# Altium PCB PCB_Instruction Register 2.0V_2021-10-21.pcbdoc
Units mm, origin at the board's own origin, x right, y up, seen from the top; angles counter-clockwise.
Board outline 124.71 x 83.95 mm, 2 copper layers (Top Layer, Bottom Layer); 28 components, 33 nets, 114 pads, 43 vias.
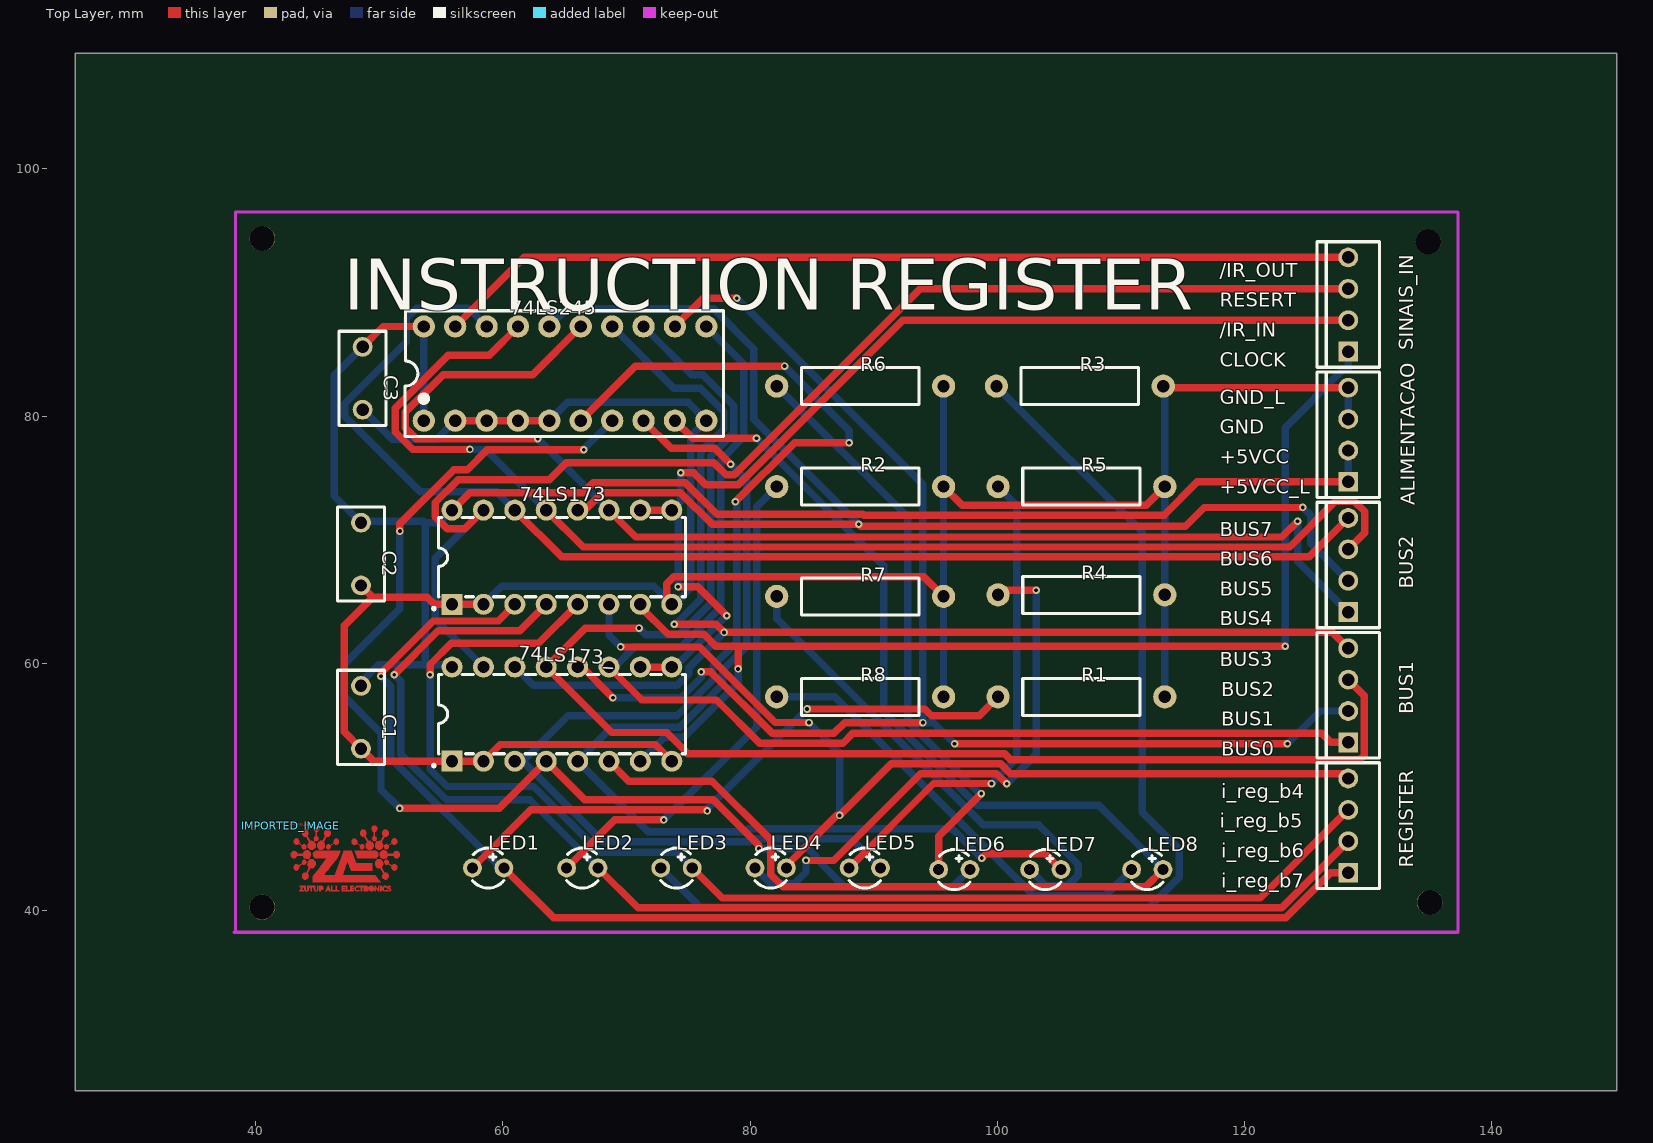
[diagram p0: Top Layer view]
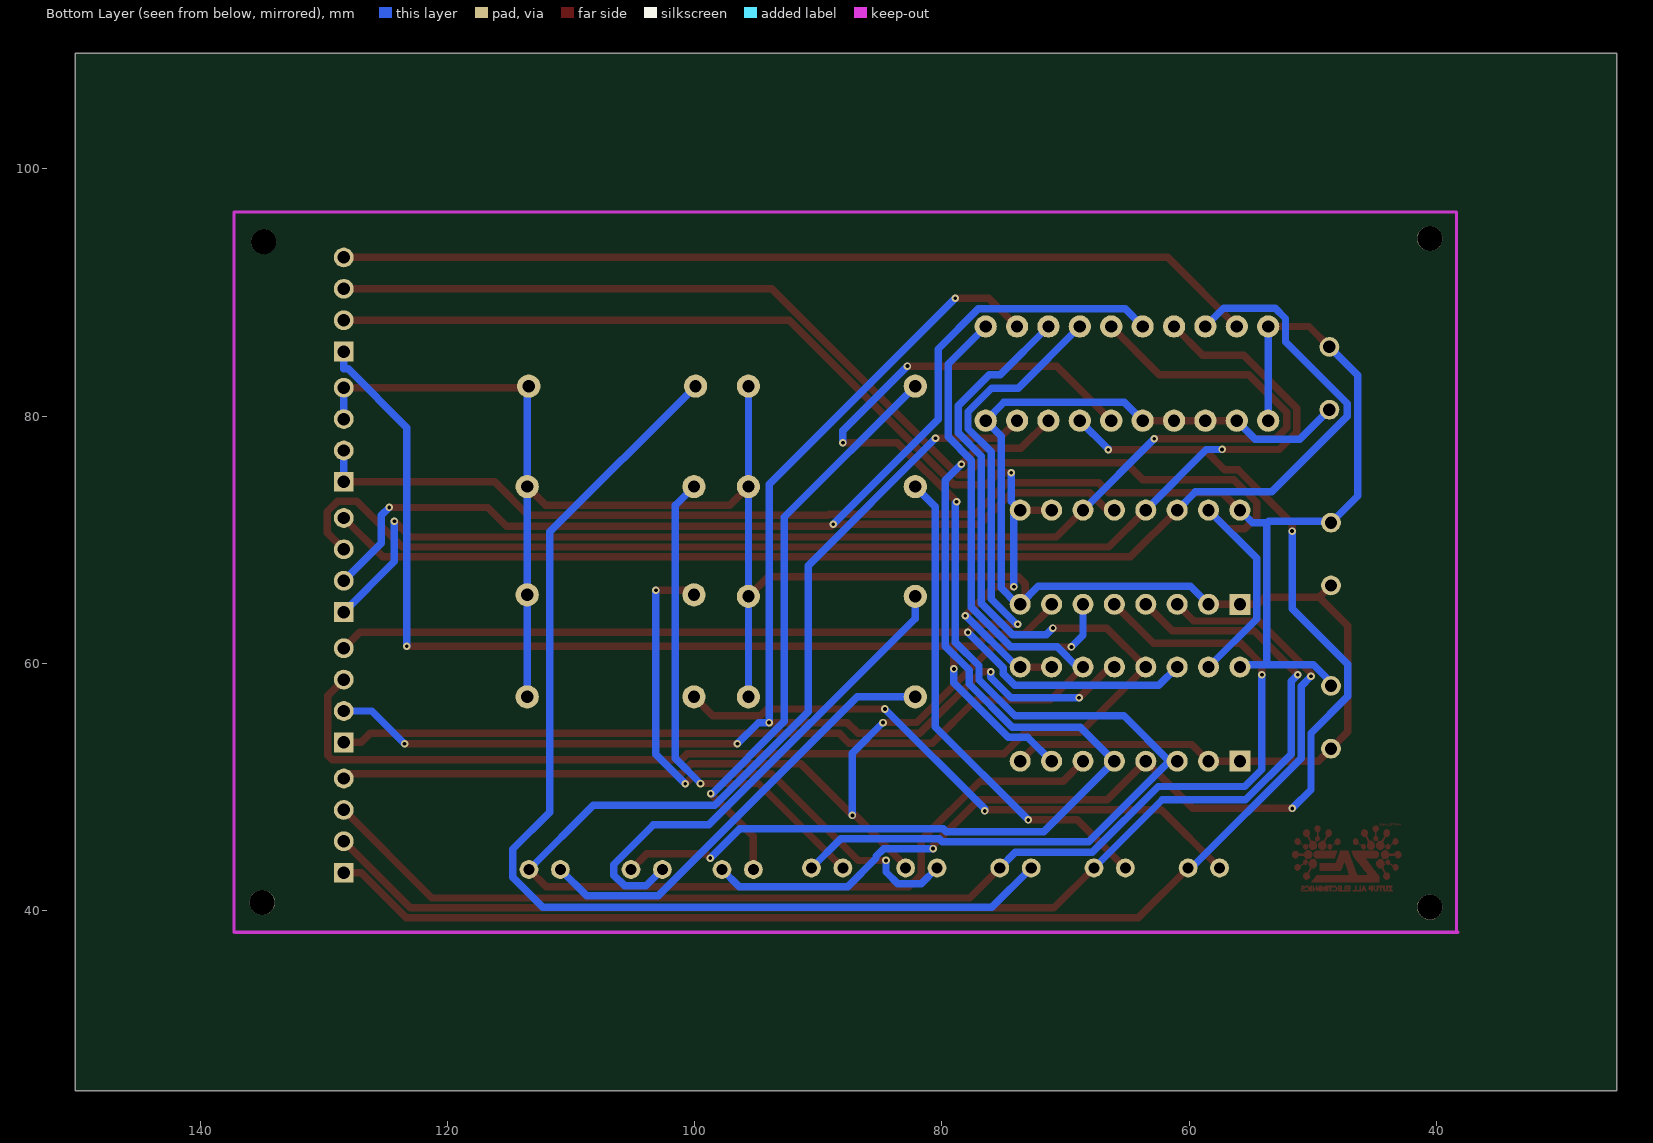
[diagram p1: Bottom Layer view, seen from below]

## Layer stack, top to bottom
Top Layer: signal copper (thickness not stored)
Dielectric: dielectric 0.32, FR-4, Dk 4.8
Bottom Layer: signal copper (thickness not stored)

## Board outline
150.114,25.4 25.4,25.4 25.4,109.347 150.114,109.347

## Components (designator, comment, footprint, x,y, rotation, side; value= is the part's Value field where it differs from the comment)
74LS173 "SN74LS173AN" PDIP-16_L19.7-W6.6-P2.54-LS7.6-BL 64.77,68.58 r0 top
74LS173_ "SN74LS173AN" PDIP-16_L19.7-W6.6-P2.54-LS7.6-BL 64.77,55.88 r0 top
74LS245 "SN74LS245N" DIP-20_L25.5-W10.0-P2.54-LS7.6-BL 65.024,83.439 r0 top
ALIMENTACAO "ALIM." HDR-TH_4P-P2.54-D1.0 128.397,78.486 r90 top
BUS1 "BUS1" HDR-TH_4P-P2.54-D1.0 128.397,57.404 r90 top
BUS2 "BUS2" HDR-TH_4P-P2.54-D1.0 128.397,67.945 r90 top
C1 "100nF 63V poli7" CAP-TH_L7.6-W3.8-P5.08-D0.51 48.514,55.626 r270 top
C2 "100nF 63V poli" CAP-TH_L7.6-W3.8-P5.08-D0.51 48.514,68.834 r270 top
C3 "100nF 63V poli" CAP-TH_L7.6-W3.8-P5.08-D0.51 48.641,83.058 r270 top
IMPORTED_IMAGE "IMPORTED_IMAGE" IMPORTED_IMAGE 42.842,46.861 r0 top
LED1 "VERDE" LED-TH_BD3.0-P2.54-RD-GREEN 58.801,43.434 r0 top
LED2 "VERDE" LED-TH_BD3.0-P2.54-RD-GREEN 66.421,43.434 r0 top
LED3 "VERDE" LED-TH_BD3.0-P2.54-RD-GREEN 74.041,43.434 r0 top
LED4 "VERDE" LED-TH_BD3.0-P2.54-RD-GREEN 81.661,43.434 r0 top
LED5 "VERDE" LED-TH_BD3.0-P2.54-RD-GREEN 89.281,43.434 r0 top
LED6 "VERDE" LED-TH_BD3.0-P2.54-RD-GREEN 96.52,43.307 r0 top
LED7 "VERDE" LED-TH_BD3.0-P2.54-RD-GREEN 103.886,43.307 r0 top
LED8 "VERDE" LED-TH_BD3.0-P2.54-RD-GREEN 112.141,43.307 r0 top
R1 "470" RES-TH_BD3.0-L9.5-P13.50-D0.6 106.807,57.277 r0 top
R2 "470" RES-TH_BD3.0-L9.5-P13.50-D0.6 88.9,74.295 r0 top
R3 "470" RES-TH_BD3.0-L9.5-P13.50-D0.6 106.68,82.423 r0 top
R4 "470" RES-TH_BD3.0-L9.5-P13.50-D0.6 106.807,65.532 r0 top
R5 "470" RES-TH_BD3.0-L9.5-P13.50-D0.6 106.807,74.295 r0 top
R6 "470" RES-TH_BD3.0-L9.5-P13.50-D0.6 88.9,82.423 r0 top
R7 "470" RES-TH_BD3.0-L9.5-P13.50-D0.6 88.9,65.405 r0 top
R8 "470" RES-TH_BD3.0-L9.5-P13.50-D0.6 88.9,57.277 r0 top
REGISTER "REGIST." HDR-TH_4P-P2.54-D1.0 128.397,46.863 r90 top
SINAIS_IN "SINAIS IN" HDR-TH_4P-P2.54-D1.0 128.397,89.027 r90 top

## Footprints (in the part's own frame and the unit in brackets; to place one, negate y for a bottom-side part, rotate by r counter-clockwise, add the part's x,y. Pads: shape width x height; smd on the part's side, far side on the other; paste and mask are expansions set on the pad)
CAP-TH_L7.6-W3.8-P5.08-D0.51 [mm]
  round 1.6 hole 1: 1(-2.54,0) 2(2.54,0)
  silkscreen extent -3.81,-1.91 3.81,1.91
DIP-20_L25.5-W10.0-P2.54-LS7.6-BL [mm]
  round 1.8 hole 1: 1(-11.43,-3.81) 2(-8.89,-3.81) 3(-6.35,-3.81) 4(-3.81,-3.81) 5(-1.27,-3.81) 6(1.27,-3.81) 7(3.81,-3.81) 8(6.35,-3.81) 9(8.89,-3.81) 10(11.43,-3.81) 11(11.43,3.81) 12(8.89,3.81) 13(6.35,3.81) 14(3.81,3.81) 15(1.27,3.81) 16(-1.27,3.81) 17(-3.81,3.81) 18(-6.35,3.81) 19(-8.89,3.81) 20(-11.43,3.81)
  silkscreen extent -12.95,-5.08 12.83,5.08
HDR-TH_4P-P2.54-D1.0 [mm]
  rect 1.6x1.6 hole 1: 1(-3.81,0)
  round 1.6 hole 1: 2(-1.27,0) 3(1.27,0) 4(3.81,0)
  silkscreen extent -5.08,-2.54 5.08,2.54
IMPORTED_IMAGE [mm]
  Top Layer region: 1.05,-5.287 1.063,-5.331 0.684,-5.331 0.684,-5.297 0.685,-5.293 0.686,-5.288 0.689,-5.282 0.692,-5.275 0.696,-5.267 0.7,-5.258 0.706,-5.249 0.712,-5.239 0.718,-5.228 0.726,-5.217 0.733,-5.206 0.741,-5.194 0.75,-5.182 0.759,-5.17 0.768,-5.158 0.778,-5.146 0.798,-5.12 0.815,-5.097 0.83,-5.077 0.842,-5.06 0.852,-5.045 0.859,-5.031 0.863,-5.02 0.865,-5.011 0.865,-5.004 0.862,-4.998 0.857,-4.993 0.849,-4.99 0.839,-4.987 0.826,-4.986 0.811,-4.985 0.793,-4.985 0.716,-4.985 0.716,-4.881 1.027,-4.881 1.027,-4.93 1.026,-4.936 1.025,-4.942 1.023,-4.949 1.02,-4.957 1.017,-4.966 1.013,-4.975 1.009,-4.985 1.004,-4.995 0.998,-5.005 0.992,-5.016 0.986,-5.027 0.979,-5.038 0.972,-5.049 0.964,-5.06 0.957,-5.071 0.949,-5.082 0.932,-5.105 0.917,-5.125 0.904,-5.143 0.894,-5.158 0.886,-5.171 0.881,-5.183 0.878,-5.193 0.877,-5.201 0.878,-5.208 0.882,-5.213 0.888,-5.218 0.897,-5.222 0.907,-5.225 0.921,-5.228 0.936,-5.231 0.954,-5.233 1.037,-5.244
  Top Layer region: 2.302,-5.331 2.302,-4.881 2.393,-4.881 2.415,-4.881 2.436,-4.882 2.456,-4.884 2.474,-4.887 2.491,-4.89 2.507,-4.894 2.522,-4.899 2.536,-4.906 2.549,-4.912 2.561,-4.92 2.572,-4.929 2.582,-4.939 2.591,-4.95 2.6,-4.962 2.608,-4.975 2.615,-4.989 2.647,-5.054 2.583,-5.187 2.489,-5.209 2.395,-5.232 2.395,-5.331 hole: 452331.158,418003.357 452331.158,417285.553 452331.158,417285.553 453412.944,417517.455 453412.944,417517.455 453621.224,418720.907 453621.224,418720.907 452331.158,418720.907 452331.158,418720.907 452331.158,418003.357
  Top Layer region: 1.68,-5.158 1.68,-5.331 1.587,-5.331 1.587,-4.985 1.47,-4.985 1.452,-5.109 1.448,-5.135 1.442,-5.161 1.436,-5.186 1.429,-5.211 1.421,-5.233 1.413,-5.253 1.405,-5.27 1.398,-5.282 1.361,-5.331 1.153,-5.331 1.089,-5.197 1.089,-4.881 1.182,-4.881 1.182,-5.184 1.273,-5.267 1.305,-5.245 1.338,-5.223 1.338,-4.881 1.804,-4.881 1.804,-4.985 1.68,-4.985
  Top Layer region: 6.671,-5.276 6.622,-5.331 6.413,-5.331 6.315,-5.222 6.315,-5.007 6.418,-4.881 6.617,-4.881 6.665,-4.941 6.679,-4.96 6.692,-4.981 6.702,-5.002 6.711,-5.023 6.717,-5.046 6.722,-5.068 6.725,-5.091 6.727,-5.114 6.726,-5.137 6.724,-5.159 6.72,-5.181 6.713,-5.202 6.706,-5.222 6.696,-5.242 6.684,-5.26 hole: 493482.46,415978.723 494678.038,416690.685 494678.038,416690.685 494581.772,417619.309 494581.772,417619.309 494485.252,418547.933 494485.252,418547.933 493640.448,418656.391 493640.448,418656.391 492795.898,418764.595 492795.898,418764.595 492371.21,416882.455 492371.21,416882.455 493482.46,415978.723
  Top Layer region: 4.418,-5.279 4.418,-5.331 4.107,-5.331 4.107,-4.881 4.418,-4.881 4.418,-4.985 4.2,-4.985 4.2,-5.054 4.387,-5.054 4.387,-5.158 4.2,-5.158 4.2,-5.227 4.418,-5.227
  Top Layer region: 7.155,-5.106 7.155,-5.331 7.066,-5.331 6.875,-5.073 6.875,-5.331 6.782,-5.331 6.782,-4.881 6.86,-4.881 6.96,-5.011 7.06,-5.14 7.061,-5.011 7.062,-4.881 7.155,-4.881
  Top Layer region: 3.23,-5.304 3.241,-5.331 3.111,-5.331 3.111,-5.227 2.931,-5.227 2.895,-5.331 2.793,-5.331 2.814,-5.275 2.853,-5.171 2.895,-5.062 2.964,-4.881 3.068,-4.881 3.16,-5.119 hole: 458241.992,417509.581 458241.992,416990.151 458241.992,416990.151 458864.292,416990.151 458864.292,416990.151 458864.292,418028.757 458864.292,418028.757 458241.992,418028.757 458241.992,418028.757 458241.992,417509.581
  Top Layer region: 5.369,-5.33 5.278,-5.331 5.221,-5.273 5.164,-5.216 5.164,-4.988 5.233,-4.935 5.303,-4.881 5.463,-4.881 5.538,-4.964 5.538,-4.881 5.88,-4.881 5.88,-4.985 5.755,-4.985 5.755,-5.331 5.662,-5.331 5.662,-4.991 5.293,-4.991 5.275,-5.045 5.256,-5.098 5.291,-5.22 5.39,-5.263 5.426,-5.229 5.462,-5.196 5.508,-5.229 5.553,-5.261 5.506,-5.296 5.495,-5.302 5.481,-5.309 5.465,-5.315 5.447,-5.32 5.428,-5.324 5.408,-5.327 5.388,-5.329
  Top Layer region: 7.342,-5.106 7.342,-5.331 7.218,-5.331 7.218,-4.881 7.342,-4.881
  Top Layer region: 1.932,-5.331 1.884,-5.254 1.835,-5.177 1.835,-4.881 1.96,-4.881 1.96,-5.223 2.025,-5.267 2.115,-5.184 2.115,-4.881 2.209,-4.881 2.209,-5.197 2.144,-5.331
  Top Layer region: 4.48,-5.331 4.48,-4.881 4.573,-4.881 4.573,-5.227 4.76,-5.227 4.76,-5.331
  Top Layer region: 3.912,-5.287 3.925,-5.331 3.609,-5.331 3.609,-4.881 3.702,-4.881 3.702,-5.222 3.9,-5.244
  Top Layer region: 6.035,-5.279 6.035,-5.331 5.911,-5.331 5.911,-4.881 6.133,-4.881 6.253,-4.952 6.253,-5.154 6.185,-5.2 6.219,-5.238 6.232,-5.254 6.243,-5.272 6.25,-5.289 6.253,-5.303 6.249,-5.318 6.239,-5.327 6.225,-5.33 6.206,-5.329 6.186,-5.323 6.165,-5.312 6.146,-5.297 6.129,-5.279 6.111,-5.259 6.093,-5.242 6.076,-5.231 6.063,-5.227 6.035,-5.227 hole: 488729.866,417285.553 489274.188,417402.393 489274.188,417402.393 489818.764,417518.979 489818.764,417518.979 489818.764,418538.535 489818.764,418538.535 488729.866,418771.707 488729.866,418771.707 488729.866,417285.553
  Top Layer region: 3.267,-5.331 3.267,-4.881 3.36,-4.881 3.36,-5.227 3.578,-5.227 3.578,-5.331
  Top Layer region: 5.102,-5.279 5.102,-5.331 4.791,-5.331 4.791,-4.881 5.102,-4.881 5.102,-4.985 4.915,-4.985 4.915,-5.054 5.107,-5.054 5.094,-5.097 5.082,-5.14 4.999,-5.151 4.915,-5.162 4.915,-5.227 5.102,-5.227
  Top Layer region: 8.054,-5.325 7.495,-5.323 7.404,-5.222 7.404,-5.007 7.456,-4.944 7.507,-4.881 7.708,-4.881 7.777,-4.974 7.739,-5.016 7.553,-4.974 7.526,-5.023 7.52,-5.034 7.515,-5.046 7.511,-5.06 7.506,-5.074 7.503,-5.089 7.5,-5.104 7.499,-5.118 7.498,-5.13 7.497,-5.19 7.562,-5.228 7.626,-5.266 7.705,-5.193 7.727,-5.217 7.734,-5.222 7.745,-5.227 7.76,-5.231 7.778,-5.236 7.799,-5.24 7.822,-5.243 7.847,-5.246 7.872,-5.248 7.995,-5.255 8.027,-5.198 7.921,-5.159 7.814,-5.12 7.797,-5.069 7.779,-5.019 7.815,-4.915 7.887,-4.895 7.903,-4.891 7.92,-4.888 7.937,-4.885 7.954,-4.884 7.971,-4.883 7.987,-4.883 8.001,-4.884 8.014,-4.886 8.068,-4.898 8.081,-4.941 8.094,-4.985 7.902,-4.985 7.902,-5.012 7.904,-5.018 7.909,-5.025 7.918,-5.033 7.929,-5.042 7.943,-5.051 7.959,-5.06 7.976,-5.069 7.995,-5.078 8.088,-5.117 8.108,-5.172 8.127,-5.228
  Top Layer region: 7.249,-4.575 7.249,-4.604 1.773,-4.604 1.774,-4.353 1.775,-4.102 2.318,-3.392 2.427,-3.249 2.528,-3.115 2.621,-2.992 2.701,-2.883 2.768,-2.793 2.818,-2.723 2.85,-2.676 2.861,-2.657 2.862,-2.631 1.94,-2.631 1.876,-2.553 1.862,-2.536 1.849,-2.517 1.836,-2.496 1.824,-2.475 1.813,-2.455 1.804,-2.435 1.796,-2.416 1.791,-2.399 1.77,-2.323 1.82,-2.215 1.87,-2.108 1.938,-2.077 2.007,-2.047 3.01,-2.044 3.211,-2.044 3.399,-2.045 3.57,-2.046 3.718,-2.048 3.841,-2.051 3.934,-2.054 3.993,-2.057 4.013,-2.06 4.012,-2.066 4.008,-2.078 4.001,-2.095 3.992,-2.116 3.981,-2.142 3.968,-2.172 3.954,-2.205 3.938,-2.241 3.921,-2.279 3.903,-2.319 3.89,-2.346 3.768,-2.613 3.222,-3.298 3.112,-3.436 3.01,-3.566 2.917,-3.684 2.836,-3.787 2.769,-3.873 2.719,-3.939 2.687,-3.982 2.675,-3.999 2.678,-4.001 2.684,-4.003 2.695,-4.004 2.709,-4.006 2.727,-4.007 2.749,-4.008 2.774,-4.01 2.801,-4.011 2.832,-4.012 2.865,-4.013 2.9,-4.013 2.938,-4.014 2.977,-4.015 3.018,-4.015 3.06,-4.015 3.104,-4.015 3.533,-4.015 3.905,-3.029 4.278,-2.043 4.59,-2.043 4.902,-2.042 5.088,-2.536 5.274,-3.029 6.595,-3.047 6.595,-3.635 4.863,-3.635 4.729,-3.288 4.701,-3.219 4.675,-3.154 4.65,-3.095 4.627,-3.044 4.607,-3.002 4.591,-2.97 4.579,-2.949 4.572,-2.942 4.565,-2.954 4.551,-2.986 4.531,-3.035 4.506,-3.1 4.477,-3.177 4.446,-3.263 4.413,-3.355 4.379,-3.451 4.345,-3.547 4.313,-3.642 4.282,-3.731 4.255,-3.812 4.233,-3.882 4.215,-3.938 4.204,-3.978 4.2,-3.999 4.207,-4.001 4.227,-4.002 4.259,-4.004 4.304,-4.005 4.359,-4.007 4.425,-4.008 4.501,-4.009 4.586,-4.011 4.68,-4.012 4.781,-4.013 4.89,-4.013 5.005,-4.014 5.125,-4.015 5.251,-4.015 5.382,-4.015 5.516,-4.015 6.831,-4.015 7.04,-4.281 7.082,-4.335 7.121,-4.386 7.156,-4.434 7.187,-4.477 7.213,-4.514 7.232,-4.543 7.244,-4.564
  Top Layer region: 1.27,-4.348 1.179,-4.4 1.111,-4.377 1.095,-4.37 1.079,-4.362 1.06,-4.351 1.042,-4.339 1.023,-4.326 1.005,-4.312 0.988,-4.297 0.972,-4.282 0.902,-4.211 0.902,-3.99 0.967,-3.899 1.031,-3.808 1.241,-3.808 1.348,-3.596 1.455,-3.384 1.331,-3.149 1.351,-3.032 1.37,-2.915 1.452,-2.825 1.533,-2.735 1.809,-2.735 1.9,-2.836 1.991,-2.937 1.991,-3.218 1.813,-3.44 1.551,-3.447 1.45,-3.657 1.349,-3.866 1.395,-3.973 1.44,-4.08 1.36,-4.295
  Top Layer region: 7.7,-4.376 7.621,-4.398 7.533,-4.347 7.444,-4.295 7.404,-4.188 7.364,-4.08 7.41,-3.972 7.456,-3.864 7.245,-3.443 6.993,-3.443 6.813,-3.218 6.813,-2.937 6.904,-2.836 6.995,-2.735 7.271,-2.735 7.431,-2.913 7.452,-3.015 7.472,-3.118 7.412,-3.253 7.351,-3.389 7.457,-3.598 7.563,-3.808 7.773,-3.808 7.837,-3.899 7.902,-3.99 7.902,-4.179 7.84,-4.266 7.778,-4.354
  Top Layer region: 0.449,-3.634 0.437,-3.635 0.382,-3.635 0.3,-3.563 0.218,-3.491 0.218,-3.276 0.353,-3.115 0.515,-3.115 0.579,-3.165 0.642,-3.215 0.772,-3.128 0.902,-3.042 0.902,-2.878 0.953,-2.822 1.003,-2.765 1.1,-2.776 1.197,-2.787 1.28,-2.981 1.184,-3.145 1.06,-3.188 0.994,-3.149 0.927,-3.109 0.654,-3.271 0.688,-3.389 0.593,-3.592 0.543,-3.613 0.532,-3.617 0.519,-3.621 0.505,-3.625 0.491,-3.628 0.477,-3.631 0.463,-3.633
  Top Layer region: 8.504,-3.563 8.422,-3.635 8.367,-3.635 8.341,-3.633 8.313,-3.628 8.285,-3.621 8.261,-3.613 8.211,-3.592 8.116,-3.389 8.133,-3.33 8.15,-3.271 8.014,-3.19 7.877,-3.109 7.81,-3.149 7.744,-3.188 7.682,-3.167 7.62,-3.145 7.574,-3.066 7.527,-2.987 7.548,-2.921 7.553,-2.907 7.559,-2.892 7.565,-2.877 7.572,-2.862 7.579,-2.848 7.586,-2.834 7.593,-2.822 7.599,-2.812 7.63,-2.769 7.804,-2.769 7.853,-2.824 7.902,-2.878 7.902,-3.042 8.032,-3.128 8.162,-3.215 8.289,-3.115 8.442,-3.115 8.586,-3.266 8.586,-3.491
  Top Layer region: 1.178,-2.7 1.058,-2.629 1.011,-2.526 0.963,-2.423 0.525,-2.423 0.368,-2.631 0.153,-2.631 0.076,-2.546 0,-2.461 0,-2.222 0.198,-2.036 0.291,-2.057 0.385,-2.078 0.441,-2.135 0.463,-2.16 0.481,-2.188 0.493,-2.215 0.498,-2.238 0.498,-2.285 0.963,-2.285 1.012,-2.178 1.062,-2.072 1.161,-2.024 1.183,-2.013 1.202,-2.004 1.22,-1.996 1.235,-1.99 1.249,-1.985 1.262,-1.981 1.275,-1.979 1.287,-1.978 1.299,-1.979 1.311,-1.981 1.324,-1.984 1.338,-1.989 1.354,-1.995 1.371,-2.002 1.39,-2.011 1.412,-2.021 1.516,-2.07 1.618,-2.231 1.618,-2.426 1.571,-2.528 1.524,-2.629 1.464,-2.664 1.404,-2.7
  Top Layer region: 7.377,-2.7 7.214,-2.544 7.196,-2.398 7.178,-2.251 7.231,-2.161 7.284,-2.071 7.383,-2.024 7.405,-2.013 7.425,-2.004 7.442,-1.996 7.457,-1.99 7.472,-1.985 7.485,-1.981 7.497,-1.979 7.509,-1.978 7.521,-1.979 7.533,-1.981 7.547,-1.984 7.561,-1.989 7.577,-1.995 7.594,-2.003 7.614,-2.012 7.636,-2.022 7.742,-2.071 7.792,-2.178 7.841,-2.285 8.306,-2.285 8.306,-2.238 8.307,-2.228 8.311,-2.215 8.316,-2.202 8.323,-2.188 8.331,-2.174 8.341,-2.16 8.351,-2.147 8.363,-2.135 8.419,-2.078 8.513,-2.057 8.606,-2.036 8.705,-2.129 8.804,-2.222 8.804,-2.461 8.728,-2.546 8.651,-2.631 8.443,-2.631 8.374,-2.56 8.348,-2.53 8.326,-2.501 8.312,-2.475 8.306,-2.456 8.306,-2.423 7.841,-2.423 7.746,-2.629 7.626,-2.7
  Top Layer region: 5.384,-2.631 5.274,-2.366 5.252,-2.313 5.231,-2.261 5.213,-2.214 5.196,-2.171 5.183,-2.134 5.173,-2.104 5.166,-2.083 5.164,-2.072 5.164,-2.042 6.847,-2.042 6.935,-2.093 7.023,-2.144 7.043,-2.2 7.047,-2.213 7.05,-2.23 7.053,-2.249 7.056,-2.271 7.059,-2.294 7.06,-2.317 7.062,-2.34 7.062,-2.363 7.062,-2.471 6.994,-2.551 6.927,-2.631
  Top Layer region: 1.551,-1.973 1.461,-1.874 1.372,-1.774 1.35,-1.676 1.328,-1.578 1.391,-1.45 1.454,-1.321 1.231,-0.9 1.055,-0.9 0.979,-0.815 0.902,-0.73 0.902,-0.622 0.903,-0.599 0.905,-0.575 0.908,-0.55 0.912,-0.526 0.917,-0.503 0.922,-0.481 0.929,-0.462 0.935,-0.446 0.968,-0.377 1.036,-0.346 1.052,-0.34 1.068,-0.334 1.087,-0.329 1.105,-0.324 1.124,-0.32 1.143,-0.317 1.16,-0.315 1.176,-0.314 1.247,-0.312 1.324,-0.396 1.4,-0.481 1.4,-0.748 1.329,-0.827 1.436,-1.028 1.543,-1.229 1.619,-1.239 1.636,-1.241 1.654,-1.244 1.674,-1.247 1.694,-1.251 1.714,-1.254 1.734,-1.258 1.752,-1.262 1.768,-1.266 1.841,-1.284 1.916,-1.374 1.991,-1.464 1.99,-1.606 1.99,-1.748 1.936,-1.822 1.924,-1.838 1.91,-1.854 1.894,-1.87 1.878,-1.885 1.861,-1.9 1.845,-1.914 1.829,-1.925 1.814,-1.934 1.746,-1.973
  Top Layer region: 2.652,-1.872 2.55,-1.973 2.459,-1.973 2.439,-1.972 2.417,-1.97 2.394,-1.966 2.37,-1.961 2.347,-1.955 2.325,-1.948 2.304,-1.94 2.286,-1.932 2.204,-1.89 2.16,-1.795 2.15,-1.773 2.142,-1.751 2.135,-1.729 2.129,-1.707 2.124,-1.684 2.121,-1.662 2.118,-1.639 2.117,-1.617 2.118,-1.594 2.119,-1.572 2.122,-1.549 2.125,-1.526 2.13,-1.504 2.137,-1.481 2.144,-1.458 2.153,-1.436 2.19,-1.345 2.361,-1.246 2.567,-1.245 2.671,-1.034 2.775,-0.824 2.741,-0.786 2.707,-0.748 2.707,-0.515 2.773,-0.377 2.841,-0.346 2.856,-0.34 2.873,-0.334 2.891,-0.329 2.91,-0.324 2.929,-0.32 2.947,-0.317 2.964,-0.315 2.98,-0.314 3.052,-0.312 3.204,-0.481 3.204,-0.757 3.122,-0.828 3.04,-0.9 2.876,-0.9 2.761,-1.115 2.647,-1.331 2.7,-1.396 2.753,-1.461 2.753,-1.771
  Top Layer region: 7.343,-1.874 7.253,-1.973 7.058,-1.973 6.99,-1.934 6.975,-1.925 6.959,-1.914 6.943,-1.9 6.926,-1.885 6.91,-1.87 6.894,-1.854 6.88,-1.838 6.868,-1.822 6.814,-1.748 6.814,-1.606 6.813,-1.464 6.963,-1.284 7.036,-1.266 7.052,-1.262 7.07,-1.258 7.09,-1.254 7.11,-1.251 7.13,-1.247 7.15,-1.244 7.168,-1.241 7.185,-1.239 7.261,-1.229 7.475,-0.827 7.404,-0.748 7.404,-0.481 7.564,-0.303 7.793,-0.344 7.847,-0.418 7.902,-0.492 7.902,-0.73 7.749,-0.9 7.573,-0.9 7.35,-1.321 7.476,-1.578 7.454,-1.676 7.432,-1.774
  Top Layer region: 6.254,-1.973 6.152,-1.872 6.051,-1.771 6.051,-1.461 6.157,-1.331 6.043,-1.115 5.928,-0.9 5.764,-0.9 5.682,-0.828 5.6,-0.757 5.6,-0.481 5.76,-0.303 5.989,-0.344 6.043,-0.418 6.098,-0.492 6.098,-0.748 6.028,-0.825 6.132,-1.035 6.236,-1.246 6.437,-1.246 6.518,-1.288 6.6,-1.329 6.644,-1.424 6.689,-1.52 6.689,-1.7 6.644,-1.795 6.6,-1.89 6.518,-1.932 6.5,-1.94 6.48,-1.948 6.457,-1.955 6.434,-1.961 6.41,-1.966 6.387,-1.97 6.365,-1.972 6.345,-1.973
  Top Layer region: 5.789,-1.944 5.725,-1.921 5.66,-1.899 5.611,-1.815 5.562,-1.731 5.593,-1.64 5.457,-1.56 5.321,-1.479 5.231,-1.562 5.04,-1.568 4.915,-1.443 4.915,-1.2 4.967,-1.136 5.018,-1.073 5.226,-1.073 5.289,-1.142 5.351,-1.212 5.351,-1.415 5.483,-1.503 5.614,-1.59 5.674,-1.523 5.844,-1.523 5.942,-1.632 5.942,-1.833 5.866,-1.889
  Top Layer region: 3.048,-1.934 3.035,-1.935 3.022,-1.933 3.008,-1.93 2.995,-1.925 2.98,-1.918 2.965,-1.909 2.949,-1.898 2.931,-1.885 2.862,-1.831 2.862,-1.632 2.96,-1.523 3.13,-1.523 3.189,-1.587 3.321,-1.5 3.453,-1.412 3.453,-1.212 3.515,-1.142 3.578,-1.073 3.775,-1.073 3.889,-1.188 3.889,-1.443 3.764,-1.568 3.573,-1.562 3.484,-1.479 3.344,-1.561 3.205,-1.644 3.239,-1.764 3.161,-1.851 3.144,-1.869 3.129,-1.885 3.114,-1.898 3.1,-1.91 3.087,-1.919 3.073,-1.926 3.061,-1.931
  Top Layer region: 7.871,-1.852 7.832,-1.904 7.634,-1.904 7.597,-1.862 7.56,-1.821 7.56,-1.594 7.722,-1.475 7.804,-1.527 7.886,-1.579 8.018,-1.491 8.15,-1.403 8.116,-1.284 8.164,-1.182 8.186,-1.141 8.209,-1.104 8.232,-1.077 8.251,-1.062 8.261,-1.058 8.272,-1.055 8.285,-1.051 8.299,-1.048 8.313,-1.046 8.328,-1.044 8.343,-1.042 8.357,-1.041 8.422,-1.038 8.504,-1.11 8.586,-1.182 8.586,-1.414 8.504,-1.486 8.422,-1.558 8.287,-1.558 8.23,-1.511 8.173,-1.464 8.041,-1.546 7.91,-1.628 7.91,-1.8
  Top Layer region: 0.972,-1.904 0.894,-1.8 0.894,-1.638 0.764,-1.551 0.633,-1.463 0.575,-1.51 0.517,-1.558 0.382,-1.558 0.3,-1.486 0.218,-1.414 0.218,-1.182 0.382,-1.038 0.437,-1.038 0.463,-1.04 0.491,-1.045 0.519,-1.052 0.543,-1.06 0.593,-1.081 0.688,-1.284 0.671,-1.343 0.654,-1.403 0.786,-1.491 0.918,-1.579 1,-1.527 1.082,-1.475 1.163,-1.535 1.244,-1.594 1.244,-1.821 1.17,-1.904
  Top Layer region: 2.133,-1.231 2.062,-1.283 1.899,-1.214 1.88,-1.129 1.861,-1.043 1.881,-0.973 1.901,-0.904 2.022,-0.861 2.022,-0.485 1.98,-0.485 1.971,-0.483 1.96,-0.479 1.947,-0.473 1.934,-0.464 1.921,-0.454 1.907,-0.442 1.894,-0.429 1.882,-0.415 1.825,-0.345 1.825,-0.139 1.882,-0.07 1.938,0 2.147,0 2.271,-0.138 2.271,-0.331 2.174,-0.485 2.084,-0.485 2.084,-0.865 2.115,-0.865 2.122,-0.867 2.13,-0.872 2.14,-0.88 2.151,-0.89 2.162,-0.903 2.173,-0.917 2.184,-0.933 2.195,-0.95 2.245,-1.035 2.225,-1.107 2.204,-1.179
  Top Layer region: 6.822,-1.249 6.742,-1.283 6.671,-1.231 6.6,-1.179 6.559,-1.035 6.609,-0.95 6.631,-0.917 6.653,-0.89 6.674,-0.872 6.689,-0.865 6.72,-0.865 6.72,-0.485 6.63,-0.485 6.582,-0.408 6.533,-0.331 6.533,-0.138 6.595,-0.069 6.658,0 6.866,0 6.922,-0.07 6.979,-0.139 6.979,-0.345 6.922,-0.415 6.897,-0.442 6.87,-0.464 6.845,-0.479 6.824,-0.485 6.782,-0.485 6.782,-0.861 6.906,-0.905 6.943,-1.068 6.901,-1.215
LED-TH_BD3.0-P2.54-RD-GREEN [mil]
  round 60 hole 35.43: 1(-50,0) 2(50,0)
  silkscreen extent -50,-64 50,64
PDIP-16_L19.7-W6.6-P2.54-LS7.6-BL [mm]
  rect 1.7x1.7 hole 1: 1(-8.89,-3.81)
  round 1.7 hole 1: 2(-6.35,-3.81) 3(-3.81,-3.81) 4(-1.27,-3.81) 5(1.27,-3.81) 6(3.81,-3.81) 7(6.35,-3.81) 8(8.89,-3.81) 9(8.89,3.81) 10(6.35,3.81) 11(3.81,3.81) 12(1.27,3.81) 13(-1.27,3.81) 14(-3.81,3.81) 15(-6.35,3.81) 16(-8.89,3.81)
  silkscreen extent -10.46,-4.26 10,3.2
RES-TH_BD3.0-L9.5-P13.50-D0.6 [mm]
  round 1.88 hole 1: 1(-6.75,0) 2(6.75,0)
  silkscreen extent -4.75,-1.5 4.75,1.5

## Free pads (board coordinates)
  round 2.032 hole 2.032 unplated: ""(40.513,40.259) ""(40.513,94.361) ""(134.874,94.107) ""(135.001,40.64)

## Via types
v1: diameter 0.61, hole 0.305, Top Layer to Bottom Layer, 43 vias

## Nets (pads, with @x,y where several pads share a name; then routed paths per layer and width w, separated by ;. In a path a pad name is that pad's centre, name@x,y a point inside that pad or via, vN(x,y) a via of type N, cw(c..) or ccw(c..) an arc to the next point about the centre after c; other vN are vias at no path point)
+5V: 74LS173.16 74LS173_.16 74LS245.1 74LS245.20 ALIMENTACAO.1 ALIMENTACAO.2 C1.1 C2.1 C3.1 | length 135.2
  Top Layer w0.6: C3.1 50.292,87.249 74LS245.20 ; 74LS173.16 57.296,73.806 66.494,73.806 67.297,74.609 74.761,74.609 77.315,72.055 89.123,72.055 89.188,71.99 113.508,71.99 116.194,74.676 ALIMENTACAO.1
  Bottom Layer w0.6: C1.1 48.514,58.469 49.928,59.883 53.697,59.883 ; C3.1 46.359,83.316 46.359,73.529 C2.1 48.641,71.501 53.57,71.501 53.697,71.374 ; 74LS245.1 74LS245.20 ; 74LS173_.16 55.687,59.883 53.697,59.883 ; 74LS173.16 54.864,71.374 53.697,71.374 ; ALIMENTACAO.1 ALIMENTACAO.2 ; 53.697,59.883 53.697,71.374
GND: 74LS173.1 74LS173.2 74LS173.8 74LS173_.1 74LS173_.2 74LS173_.8 74LS245.2 74LS245.3 74LS245.4 74LS245.5 74LS245.10 ALIMENTACAO.3 ALIMENTACAO.4 C1.2 C2.2 C3.2 R1.2 R2.2 R3.2 R4.2 R5.2 R6.2 R7.2 R8.2 | length 226.4
  Top Layer w0.6: C2.2 49.466,65.343 ; 74LS245.2 74LS245.3 74LS245.4 74LS245.5 ; 74LS173.2 74LS173.1 54.429,64.77 53.856,65.343 49.466,65.343 ; 74LS173_.8 72.308,53.422 59.772,53.422 74LS173_.2 57.332,52.07 56.606,52.07 74LS173_.1 49.53,52.07 C1.2 47.16,54.44 47.16,63.037 49.466,65.343 ; 74LS173.8 73.247,65.183 73.247,66.423 73.824,66.999 94.056,66.999 R7.2@95.65,65.405 ; R2.2@95.65,74.295 97.152,72.793 112.055,72.793 R5.2@113.557,74.295 ; R3.2@113.43,82.423 113.557,82.296 ALIMENTACAO.4
  Bottom Layer w0.6: C3.2 51.036,78.123 54.628,78.123 74LS245.2 ; 74LS173.2 59.895,66.245 72.185,66.245 74LS173.8 73.887,64.77 75.201,66.084 75.201,78.376 74LS245.10 74.975,81.108 65.233,81.108 74LS245.5 ; R8.2@95.65,57.277 95.65,65.405 95.65,74.295 R6.2@95.65,82.423 ; R3.2@113.43,82.423 113.557,82.296 113.557,74.295 113.557,65.532 R1.2@113.557,57.277 ; ALIMENTACAO.3 ALIMENTACAO.4
LED1_1: LED1.1 R1.1 | length 48.9
  Top Layer w0.6: LED1.1 62.246,48.149 76.423,48.149 v1(76.527,48.046) ; v1(84.612,56.295) 94.14,56.295 94.677,55.758 98.538,55.758 R1.1@100.057,57.277
  Bottom Layer w0.6: v1(76.527,48.046) 76.527,48.21 v1(84.612,56.295)
LED2_1: LED2.1 R2.1 | length 40.2
  Top Layer w0.6: LED2.1 69.038,47.321 v1(73.001,47.321)
  Bottom Layer w0.6: v1(73.001,47.321) 80.521,54.84 80.521,72.666 R2.1@82.15,74.295
LED3_1: LED3.1 R3.1 | length 90.1
  Bottom Layer w0.6: LED3.1 75.948,40.257 112.283,40.257 114.709,42.684 114.709,44.97 111.729,47.95 111.729,70.624 R3.1@99.93,82.423
LED4_1: LED4.1 R4.1 | length 45.4
  Top Layer w0.6: v1(84.52,44.039) 86.753,44.039 93.785,51.072 99.937,51.072 v1(100.761,50.248) ; R4.1@100.057,65.532 100.429,65.904 v1(103.141,65.904)
  Bottom Layer w0.6: LED4.1 81.676,42.149 83.562,42.149 84.52,43.107 v1(84.52,44.039) ; v1(100.761,50.248) 103.141,52.627 v1(103.141,65.904)
R5_1: LED5.1 R5.1 | length 39.9
  Top Layer w0.6: LED5.1 94.841,50.264 v1(99.531,50.264)
  Bottom Layer w0.6: v1(99.531,50.264) 101.586,52.318 101.586,72.766 R5.1@100.057,74.295
R6_1: LED6.1 R6.1 | length 47.5
  Top Layer w0.6: LED6.1 95.25,45.998 v1(98.705,49.453)
  Bottom Layer w0.6: R6.1@82.15,82.423 92.745,71.828 92.745,55.29 98.582,49.453 v1(98.705,49.453)
R7_1: LED7.1 R7.1 | length 40.1
  Bottom Layer w0.6: R7.1@82.15,65.405 82.15,63.615 98.848,46.917 103.338,46.917 106.542,43.714 106.542,42.846 105.675,41.979 103.944,41.979 LED7.1
R8_1: LED8.1 R8.1 | length 36.3
  Bottom Layer w0.6: R8.1@82.15,57.277 86.837,57.277 102.937,41.176 108.74,41.176 LED8.1
S$31: 
S$33: 
S$35: 
U1_3: 74LS173.3 LED1.2 REGISTER.1 | length 104.7
  Top Layer w0.6: v1(50.13,58.943) 50.13,59.204 54.344,63.417 59.607,63.417 74LS173.3 ; LED1.2 64.108,39.397 123.34,39.397 126.995,43.053 REGISTER.1
  Bottom Layer w0.6: v1(50.13,58.943) 50.933,58.141 50.933,52.309 59.807,43.434 LED1.2
U1_4: 74LS173.4 LED2.2 REGISTER.2 | length 105.4
  Top Layer w0.6: v1(51.202,59.076) 54.741,62.615 61.345,62.615 74LS173.4 ; LED2.2 70.925,40.2 123.004,40.2 REGISTER.2
  Bottom Layer w0.6: v1(51.202,59.076) 51.735,58.543 51.735,52.641 55.441,48.936 62.189,48.936 LED2.2
U1_5: 74LS173.5 LED3.2 REGISTER.3 | length 104
  Top Layer w0.6: v1(54.098,59.068) 54.098,59.899 55.801,61.602 62.872,61.602 74LS173.5 ; LED3.2 77.742,41.003 121.267,41.003 REGISTER.3
  Bottom Layer w0.6: v1(54.098,59.068) 54.098,51.413 55.49,50.022 62.501,50.022 67.824,44.698 74.047,44.698 LED3.2
U1_6: 74LS173.6 LED4.2 REGISTER.4 | length 79.7
  Top Layer w0.6: v1(69.515,61.316) 75.923,61.316 82.038,55.2 v1(84.763,55.2) ; LED4.2 82.931,43.591 87.024,47.684 v1(87.242,47.684) 91.432,51.874 100.27,51.874 101.073,51.072 127.998,51.072 REGISTER.4
  Bottom Layer w0.6: 74LS173.6 68.58,62.251 v1(69.515,61.316) ; v1(84.763,55.2) 87.242,52.721 v1(87.242,47.684)
U1_7: 74LS173.7 74LS173_.7 SINAIS_IN.1 | length 93.3
  Top Layer w0.6: 74LS173.7 71.12,64.578 73.354,62.344 76.266,62.344 77.231,61.378 79.027,61.378 ; v1(79.027,59.542) 79.027,61.378 ; v1(123.292,61.378) 79.027,61.378
  Bottom Layer w0.6: 74LS173_.7 73.066,54.016 74.63,54.016 79.027,58.413 v1(79.027,59.542) ; v1(123.292,61.378) 123.292,79.061 128.046,83.815 128.397,83.815 SINAIS_IN.1
U1_9: 74LS173.9 74LS173.10 74LS173_.9 74LS173_.10 SINAIS_IN.2 | length 85.8
  Top Layer w0.6: 74LS173_.10 74LS173_.9 ; 74LS173.10 74LS173.9 ; v1(74.167,66.192) 75.759,66.192 v1(78.108,63.843) ; v1(74.394,75.416) 75.421,75.416 76.4,74.437 79.032,74.437 92.352,87.757 SINAIS_IN.2
  Bottom Layer w0.6: 74LS173_.9 73.903,59.69 78.056,63.843 v1(78.108,63.843) ; v1(74.167,66.192) 74.167,71.883 74LS173.9 74.394,73.124 v1(74.394,75.416)
U1_11: 74LS173.11 74LS245.15 BUS2.1 | length 103.8
  Top Layer w0.6: v1(62.806,78.164) 52.969,78.164 52.09,79.042 52.09,80.296 55.153,83.358 62.403,83.358 74LS245.15 ; 74LS173.11 70.759,70.211 123.023,70.211 v1(124.303,71.49)
  Bottom Layer w0.6: v1(62.806,78.164) 74LS173.11 ; v1(124.303,71.49) 124.303,68.229 BUS2.1
U1_12: 74LS173.12 74LS245.16 BUS2.2 | length 104.6
  Top Layer w0.6: 74LS173.12 66.615,72.39 68.031,73.806 74.36,73.806 76.918,71.248 v1(88.789,71.248) 88.963,71.073 115.226,71.073 116.756,72.603 v1(124.72,72.603)
  Bottom Layer w0.6: 74LS245.16 65.173,88.668 77.047,88.668 80.292,85.424 80.292,79.745 v1(88.789,71.248) ; v1(124.72,72.603) 125.354,71.969 125.354,69.718 BUS2.2
U1_13: 74LS173.13 74LS245.17 BUS2.3 | length 102.4
  Top Layer w0.6: v1(57.329,77.298) 52.7,77.298 51.287,78.71 51.287,80.628 55.568,84.909 58.874,84.909 74LS245.17 ; 74LS173.13 66.482,69.408 123.65,69.408 127.355,73.113 128.896,73.113 129.735,72.275 129.735,70.553 BUS2.3
  Bottom Layer w0.6: v1(57.329,77.298) 58.592,77.298 74LS173.13
U1_14: 74LS173.14 74LS245.18 BUS2.4 | length 104.6
  Top Layer w0.6: 74LS173.14 64.745,68.605 125.247,68.605 BUS2.4
  Bottom Layer w0.6: 74LS245.18 57.21,88.713 53.009,88.713 52.192,87.895 52.192,86.01 47.198,81.016 47.198,79.978 53.306,73.87 59.48,73.87 74LS173.14
U1_15: 74LS173.15 74LS173_.15 SINAIS_IN.3 | length 103.9
  Top Layer w0.6: 74LS173.15 56.912,70.882 55.476,70.882 54.528,71.83 54.528,73.003 56.387,74.862 63.759,74.862 65.12,76.224 77.063,76.224 78.046,75.241 78.701,75.241 93.757,90.297 SINAIS_IN.3
  Bottom Layer w0.6: 74LS173_.15 54.528,63.582 54.528,68.498 74LS173.15
U2_3: 74LS173_.3 74LS245.6 LED5.2 | length 104.6
  Top Layer w0.6: 74LS245.6 70.709,84.044 v1(82.788,84.044) ; v1(78.811,73.061) 83.598,77.848 v1(88.005,77.848)
  Bottom Layer w0.6: 74LS173_.3 74LS173_.3@61.588,52.07 ; v1(78.811,73.061) 78.915,72.957 78.915,61.707 76.994,59.786 76.994,58.651 74.084,55.741 65.259,55.741 74LS173_.3@61.588,52.07 ; v1(82.788,84.044) 88.005,78.827 v1(88.005,77.848) ; LED5.2 88.179,45.806 80.226,45.806 79.976,45.555 68.103,45.555 74LS173_.3@61.588,52.07
U2_4: 74LS173_.4 74LS245.7 LED6.2 | length 100.2
  Top Layer w0.6: v1(51.649,48.253) 59.683,48.253 74LS173_.4 66.618,48.952 77.02,48.952 80.709,45.263 v1(80.709,44.998) ; v1(51.66,70.694) 51.66,71.292 56.033,75.665 57.125,75.665 58.739,77.278 v1(66.544,77.278)
  Bottom Layer w0.6: v1(51.649,48.253) 50.13,49.772 50.13,54.343 47.16,57.312 47.16,59.91 51.66,64.41 v1(51.66,70.694) ; v1(66.544,77.278) 66.544,77.339 74LS245.7 ; v1(80.709,44.998) 84.702,44.998 85.327,44.374 85.327,44.216 87.624,41.919 96.402,41.919 LED6.2
U2_5: 74LS173_.5 74LS245.8 LED7.2 | length 85.2
  Top Layer w0.6: 74LS245.8 73.613,77.39 77.125,77.39 v1(78.417,76.099) ; v1(98.744,44.229) 99.086,44.571 103.892,44.571 LED7.2
  Bottom Layer w0.6: v1(78.417,76.099) 79.718,74.798 79.718,61.374 77.797,59.454 77.797,58.319 74.298,54.819 68.789,54.819 74LS173_.5 71.752,46.358 79.644,46.358 79.894,46.608 96.364,46.608 v1(98.744,44.229)
U2_6: 74LS173_.6 74LS245.9 LED8.2 | length 112.7
  Top Layer w0.6: 74LS173_.6 70.187,50.463 76.91,50.463 81.661,45.712 81.661,42.905 82.662,41.904 112.008,41.904 LED8.2 ; 74LS245.9 75.345,78.198 v1(80.516,78.198)
  Bottom Layer w0.6: v1(80.516,78.198) 90.817,67.896 90.817,56.082 98.377,48.523 108.195,48.523 LED8.2
U2_11: 74LS173_.11 74LS245.11 BUS1.1 | length 98.8
  Top Layer w0.6: 74LS173_.11 71.246,57.024 77.274,57.024 80.777,53.521 87.512,53.521 88.315,54.324 126.265,54.324 126.995,53.594 BUS1.1
  Bottom Layer w0.6: 74LS173_.11 69.031,59.69 70.673,61.332 74.41,61.332 77.61,64.532 77.61,76.433 79.489,78.312 79.489,84.214 74LS245.11
U2_12: 74LS173_.12 74LS245.12 BUS1.2 | length 115.3
  Top Layer w0.6: 74LS173_.12 66.409,59.69 v1(68.898,57.201) ; 74LS245.12 76.194,89.529 v1(78.923,89.529) ; v1(76.053,59.294) 76.809,59.294 81.779,54.324 86.779,54.324 87.648,55.193 v1(93.983,55.193) ; v1(96.544,53.485) v1(123.481,53.485)
  Bottom Layer w0.6: v1(68.898,57.201) 74.409,57.201 76.053,58.845 v1(76.053,59.294) ; v1(78.923,89.529) 93.983,74.468 v1(93.983,55.193) 94.836,55.193 v1(96.544,53.485) ; v1(123.481,53.485) 126.13,56.134 BUS1.2
U2_13: 74LS173_.13 74LS245.13 BUS1.3 | length 118.7
  Top Layer w0.6: v1(71.014,62.84) 66.65,62.84 74LS173_.13 68.798,54.392 73.253,54.392 74.968,52.677 100.602,52.677 101.103,52.176 129.345,52.176 129.7,52.531 129.7,57.371 BUS1.3
  Bottom Layer w0.6: v1(71.014,62.84) 71.542,62.311 74.254,62.311 76.807,64.864 76.807,76.765 78.686,78.644 78.686,80.824 76.162,83.348 75.275,83.348 74LS245.13
U2_14: 74LS173_.14 74LS245.14 BUS1.4 | length 105.8
  Top Layer w0.6: v1(73.854,63.151) 77.238,63.151 v1(77.894,62.495) 127.116,62.495 BUS1.4
  Bottom Layer w0.6: 74LS173_.14 62.439,58.211 74.099,58.211 75.025,59.138 75.025,59.625 v1(77.894,62.495) ; 74LS245.14 73.823,82.26 75.986,82.26 77.883,80.364 77.883,78.976 76.004,77.097 76.004,65.197 73.958,63.151 v1(73.854,63.151)
U3_19: 74LS245.19 SINAIS_IN.4 | length 74.6
  Top Layer w0.6: 74LS245.19 61.722,92.837 SINAIS_IN.4

## Silkscreen, mask and mechanical layers (free items; w line width, h text height)
Top Overlay:
  text "/IR_OUT" at 117.983,91.249 h1.14
  text "RESERT" at 117.983,88.837 h1.14
  text "INSTRUCTION REGISTER" at 47.117,88.607 h4.14
  text "/IR_IN" at 117.983,86.423 h1.14
  text "CLOCK" at 117.983,84.01 h1.14
  text "GND_L" at 117.983,80.962 h1.14
  text "GND" at 117.983,78.549 h1.14
  text "+5VCC" at 117.983,76.136 h1.14
  text "+5VCC_L" at 117.983,73.724 h1.14
  text "BUS7" at 117.983,70.294 h1.14
  text "BUS6" at 117.983,67.882 h1.14
  text "BUS5" at 117.983,65.468 h1.14
  text "BUS4" at 117.983,63.055 h1.14
  text "BUS3" at 117.983,59.753 h1.14
  text "BUS2" at 118.11,57.34 h1.14
  text "BUS1" at 118.11,54.927 h1.14
  text "BUS0" at 118.11,52.514 h1.14
  text "i_reg_b4" at 118.11,49.085 h1.14
  text "i_reg_b5" at 117.983,46.672 h1.14
  text "i_reg_b6" at 118.11,44.259 h1.14
  text "i_reg_b7" at 118.11,41.846 h1.14